# Altium PCB lcd_keyb.PcbDoc
Units mm, origin at the board's own origin, x right, y up, seen from the top; angles counter-clockwise.
Board outline 51 x 21.97 mm, 2 copper layers (Top Layer, Bottom Layer), stack 1.571 mm thick; 3 components, 17 nets, 35 pads, 0 vias.
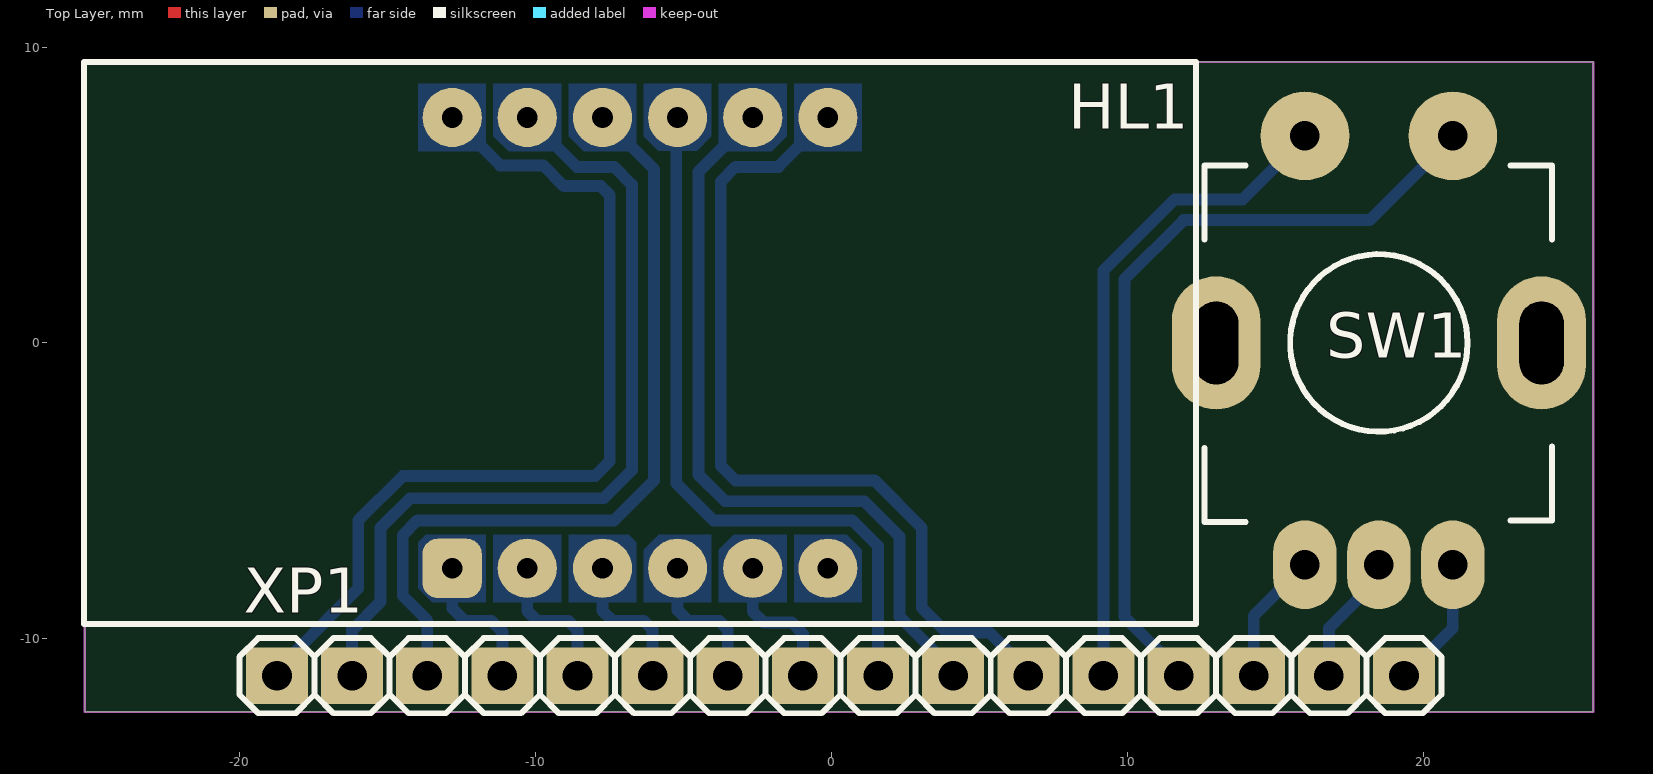
[diagram p0: Top Layer view]
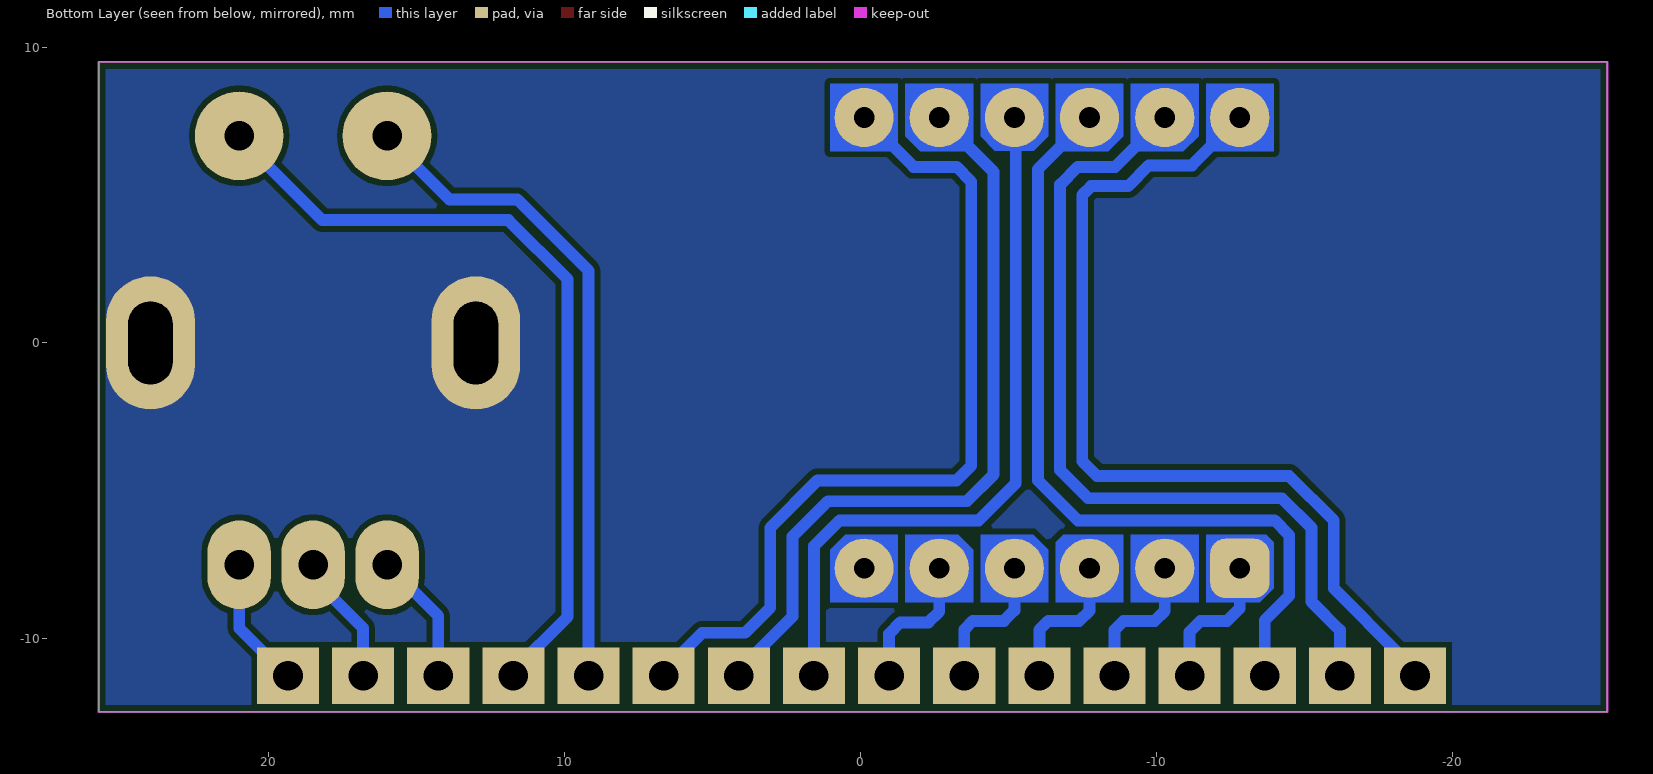
[diagram p1: Bottom Layer view, seen from below]

## Layer stack, top to bottom
Top Solder: solder mask 0.0102, Solder Resist, Dk 3.5
Top Layer: signal copper 0.0356
Dielectric 1: dielectric 1.5, FR-4, Dk 4.8
Bottom Layer: signal copper 0.0356
Bottom Solder: solder mask 0.0102, Solder Resist, Dk 3.5

## Board outline
-25.25,-12.475 25.75,-12.475 25.75,9.5 -25.25,9.5

## Design rules (kind name [scope] priority, off if disabled: settings)
Clearance [All] p1: gap=0.2 ignorepadtopadclearanceinfootprint=FALSE except(0: Arc-Hole Track-Hole SMDPad-Hole THPad-Hole Via-Hole Fill-Hole Poly-Hole Region-Hole Text-Hole)
MinimumSolderMaskSliver [All] p1: minsoldermaskwidth=0.2
PolygonConnect [All] p1: connectstyle=Direct reliefconductorwidth=0.254 reliefentries=4 polygonreliefangle="90 Angle" airgapwidth=0.254
RoutingVias [All] p1: holewidth=0.711 width=1.27 viastyle="Through Hole" minholewidth=0.711 minwidth=1.27 maxholewidth=0.711 maxwidth=1.27
SolderMaskExpansion [All] p1: expansion=0.102
Width [All] p1: maxlimit=5 minlimit=0.2 preferedwidth=0.254
29 further rules are at their usual default settings.

## Components (designator, comment, footprint, x,y, rotation, side; value= is the part's Value field where it differs from the comment)
HL1 "BA56-12SRWA" BX56-12 -6.477,0 r0 top
SW1 "EC11E09244AQ" EC11E09244AQ 18.5,0 r0 top
XP1 "PLS" PLS-16R -18.75,-11.25 r0 top

## Footprints (in the part's own frame and the unit in brackets; to place one, negate y for a bottom-side part, rotate by r counter-clockwise, add the part's x,y. Pads: shape width x height; smd on the part's side, far side on the other; paste and mask are expansions set on the pad)
BX56-12 [mm] "BA56-12SRWA Common Anode 3 Segments"
  rrect50% 2x2 hole 0.7 mask+0.1: 1(-6.35,-7.62)
  round 2 hole 0.7 mask+0.1: 2(-3.81,-7.62) 3(-1.27,-7.62) 4(1.27,-7.62) 5(3.81,-7.62) 6(6.35,-7.62) 7(6.35,7.62) 8(3.81,7.62) 9(1.27,7.62) 10(-1.27,7.62) 11(-3.81,7.62) 12(-6.35,7.62)
  silkscreen extent -18.8,-9.5 18.8,9.5, body extent -18.8,-9.5 18.8,9.5, height 8.11
EC11E09244AQ [mm]
  oval 2.15x3 hole 1: A(-2.5,-7.5) B(2.5,-7.5) C(0,-7.5)
  oval 3x4.5 hole 1.5 slot 2.8 at 90 deg: MH1(-5.5,0) MH2(5.5,0)
  round 3 hole 1: SW1(-2.5,7) SW2(2.5,7)
  silkscreen extent -5.9,-6.05 5.85,6, body extent -6.36,-7.65 6.37,7.15, height 24.51
PLS-16R [mm]
  rect 2.1x1.9 hole 1: 1(0,0) 2(2.54,0) 3(5.08,0) 4(7.62,0) 5(10.16,0) 6(12.7,0) 7(15.24,0) 8(17.78,0) 9(20.32,0) 10(22.86,0) 11(25.4,0) 12(27.94,0) 13(30.48,0) 14(33.02,0) 15(35.56,0) 16(38.1,0)
  silkscreen extent -1.27,-1.27 39.37,1.27, body extent -1.27,-7.35 39.37,1.27, height 5.46

## Part data
XP1: library part PLS-16R, ComponentLink1URL=http://lib.chipdip.ru/227/DOC000227157.pdf, Device=PLS-16, Family=PLS, Part Number=PLS-16R, Table=AUK
HL1: Device=BA56-12SRWA, Part Number=BA56-12SRWA, Table="Seven Segment Displays"
SW1: Device=EC11E09244AQ, Part Number=EC11E09244AQ, Table=Button

## Nets (pads, with @x,y where several pads share a name; then routed paths per layer and width w, separated by ;. In a path a pad name is that pad's centre, name@x,y a point inside that pad or via, vN(x,y) a via of type N, cw(c..) or ccw(c..) an arc to the next point about the centre after c; other vN are vias at no path point)
ENC_A: SW1.A XP1.14 | length 4.5
  Bottom Layer w0.4: XP1.14 14.27,-9.23 SW1.A ; SW1.A@16.021,-7.521 SW1.A@16.042,-7.5
ENC_B: SW1.B XP1.16 | length 4.5
  Bottom Layer w0.4: XP1.16 19.4,-11.25 21,-9.65 SW1.B
ENC_C: SW1.C XP1.15 | length 4.5
  Bottom Layer w0.4: XP1.15 16.81,-9.64 18.5,-7.95 SW1.C
ENC_SW1: SW1.SW1 XP1.12 | length 22.4
  Bottom Layer w0.4: XP1.12 9.19,2.44 11.6,4.85 13.892,4.85 SW1.SW1@16.042,7
ENC_SW2: SW1.SW2 XP1.13 | length 27.3
  Bottom Layer w0.4: XP1.13 11.73,-11.08 9.9,-9.25 9.9,2.153 11.897,4.15 18.192,4.15 SW1.SW2@21.042,7 ; XP1.13@12.188,-10.791 XP1.13@12.192,-10.795
GND: SW1.MH1 SW1.MH2
SEG_1: HL1.12 XP1.1 | length 30.5
  Bottom Layer w0.4: XP1.1@-18.288,-10.795 -18.288,-10.588 -16,-8.3 -16,-6 -14.5,-4.5 -8,-4.5 -7.5,-4 -7.5,5 -7.8,5.3 -9.05,5.3 -9.75,6 -11.207,6 HL1.12
SEG_2: HL1.9 XP1.9 | length 24.5
  Bottom Layer w0.4: HL1.9 -5.25,7.577 -5.25,-4.75 -4,-6 0.7,-6 1.57,-6.87 XP1.9
SEG_3: HL1.8 XP1.10 | length 25.9
  Bottom Layer w0.4: HL1.8 -4.5,5.787 -4.5,-4.45 -3.6,-5.35 1.1,-5.35 2.3,-6.55 2.3,-9.25 4.11,-11.06 XP1.10
SEG_A: HL1.11 XP1.2 | length 28.8
  Bottom Layer w0.4: XP1.2 -16.21,-9.71 -15.25,-8.75 -15.25,-6.25 -14.25,-5.25 -7.7,-5.25 -6.75,-4.3 -6.75,5.35 -7.35,5.95 -8.617,5.95 HL1.11
SEG_B: HL1.7 XP1.11 | length 29.1
  Bottom Layer w0.4: HL1.7 -1.797,5.95 -3.25,5.95 -3.75,5.45 -3.75,-4.15 -3.25,-4.65 1.45,-4.65 3.05,-6.25 3.05,-8.95 3.9,-9.8 5.35,-9.8 6.65,-11.1 XP1.11
SEG_C: HL1.4 XP1.7 | length 4.9
  Bottom Layer w0.4: HL1.4 -5.207,-9.043 -4.85,-9.4 -3.8,-9.4 -3.51,-9.69 XP1.7
SEG_D: HL1.2 XP1.5 | length 4.9
  Bottom Layer w0.4: HL1.2 -10.287,-9.063 -9.95,-9.4 -8.9,-9.4 -8.59,-9.71 XP1.5
SEG_DP: HL1.3 XP1.6 | length 4.9
  Bottom Layer w0.4: HL1.3 -7.747,-9.053 -7.4,-9.4 -6.35,-9.4 -6.05,-9.7 XP1.6
SEG_E: HL1.1 XP1.4 | length 4.9
  Bottom Layer w0.4: HL1.1 -12.827,-8.973 -12.4,-9.4 -11.5,-9.4 -11.13,-9.77 XP1.4
SEG_F: HL1.10 XP1.3 | length 27.4
  Bottom Layer w0.4: XP1.3 -13.67,-9.38 -14.5,-8.55 -14.5,-6.5 -14,-6 -7.35,-6 -6,-4.65 -6,5.873 HL1.10
SEG_G: HL1.5 XP1.8 | length 4.9
  Bottom Layer w0.4: HL1.5 -2.667,-9.083 -2.3,-9.45 -1.35,-9.45 -0.97,-9.83 XP1.8
pads on no net: HL1.6

## Polygon pours and split planes (outlines as drawn)
GND on Bottom Layer "GND" (solid, pour order 4): -25.25,9.5 25.75,9.5 25.75,-12.475 -25.25,-12.475

## Keep-outs
Keep-Out Layer:
  the board outline again, w0.075

## Other copper
Bottom Layer:
  region net SEG_B: 1.016,8.763 1.016,6.477 -1.27,6.477 -1.27,6.985 -1.27,8.763
  region net SEG_2: -4.064,8.763 -4.064,6.985 -4.55,6.5 -5.865,6.5 -6.35,6.985 -6.35,8.763
  region: 1.016,-6.985 1.016,-8.763 -1.27,-8.763 -1.27,-6.477 0.508,-6.477
  region net SEG_A: -9.144,8.763 -9.144,6.477 -10.922,6.477 -11.43,6.985 -11.43,8.763
  region net SEG_F: -6.604,8.763 -6.604,6.477 -8.382,6.477 -8.89,6.985 -8.89,8.763
  region net SEG_E: -13.97,-8.3 -13.97,-6.731 -13.716,-6.477 -11.684,-6.477 -11.684,-8.763 -13.507,-8.763
  region net SEG_3: -3.81,8.763 -1.524,8.763 -1.524,6.985 -2.032,6.477 -3.81,6.477
  region net SEG_1: -13.97,8.763 -11.684,8.763 -11.684,6.477 -12.192,6.477 -13.97,6.477
  region net SEG_D: -11.43,-6.477 -9.144,-6.477 -9.144,-8.763 -11.43,-8.763
  region net SEG_DP: -8.89,-6.477 -6.858,-6.477 -6.604,-6.731 -6.604,-8.763 -8.89,-8.763
  region net SEG_C: -5.842,-6.477 -4.064,-6.477 -4.064,-8.763 -6.35,-8.763 -6.35,-6.985
  region net SEG_G: -3.302,-6.477 -1.524,-6.477 -1.524,-8.763 -3.81,-8.763 -3.81,-6.985